# Altium PCB PROGRAM COUNTER.PcbDoc
Units mil, origin at the board's own origin, x right, y up, seen from the top; angles counter-clockwise.
Board outline 1540 x 1515 mil, 2 copper layers (Top Layer, Bottom Layer); 14 components, 19 nets, 67 pads, 7 vias.
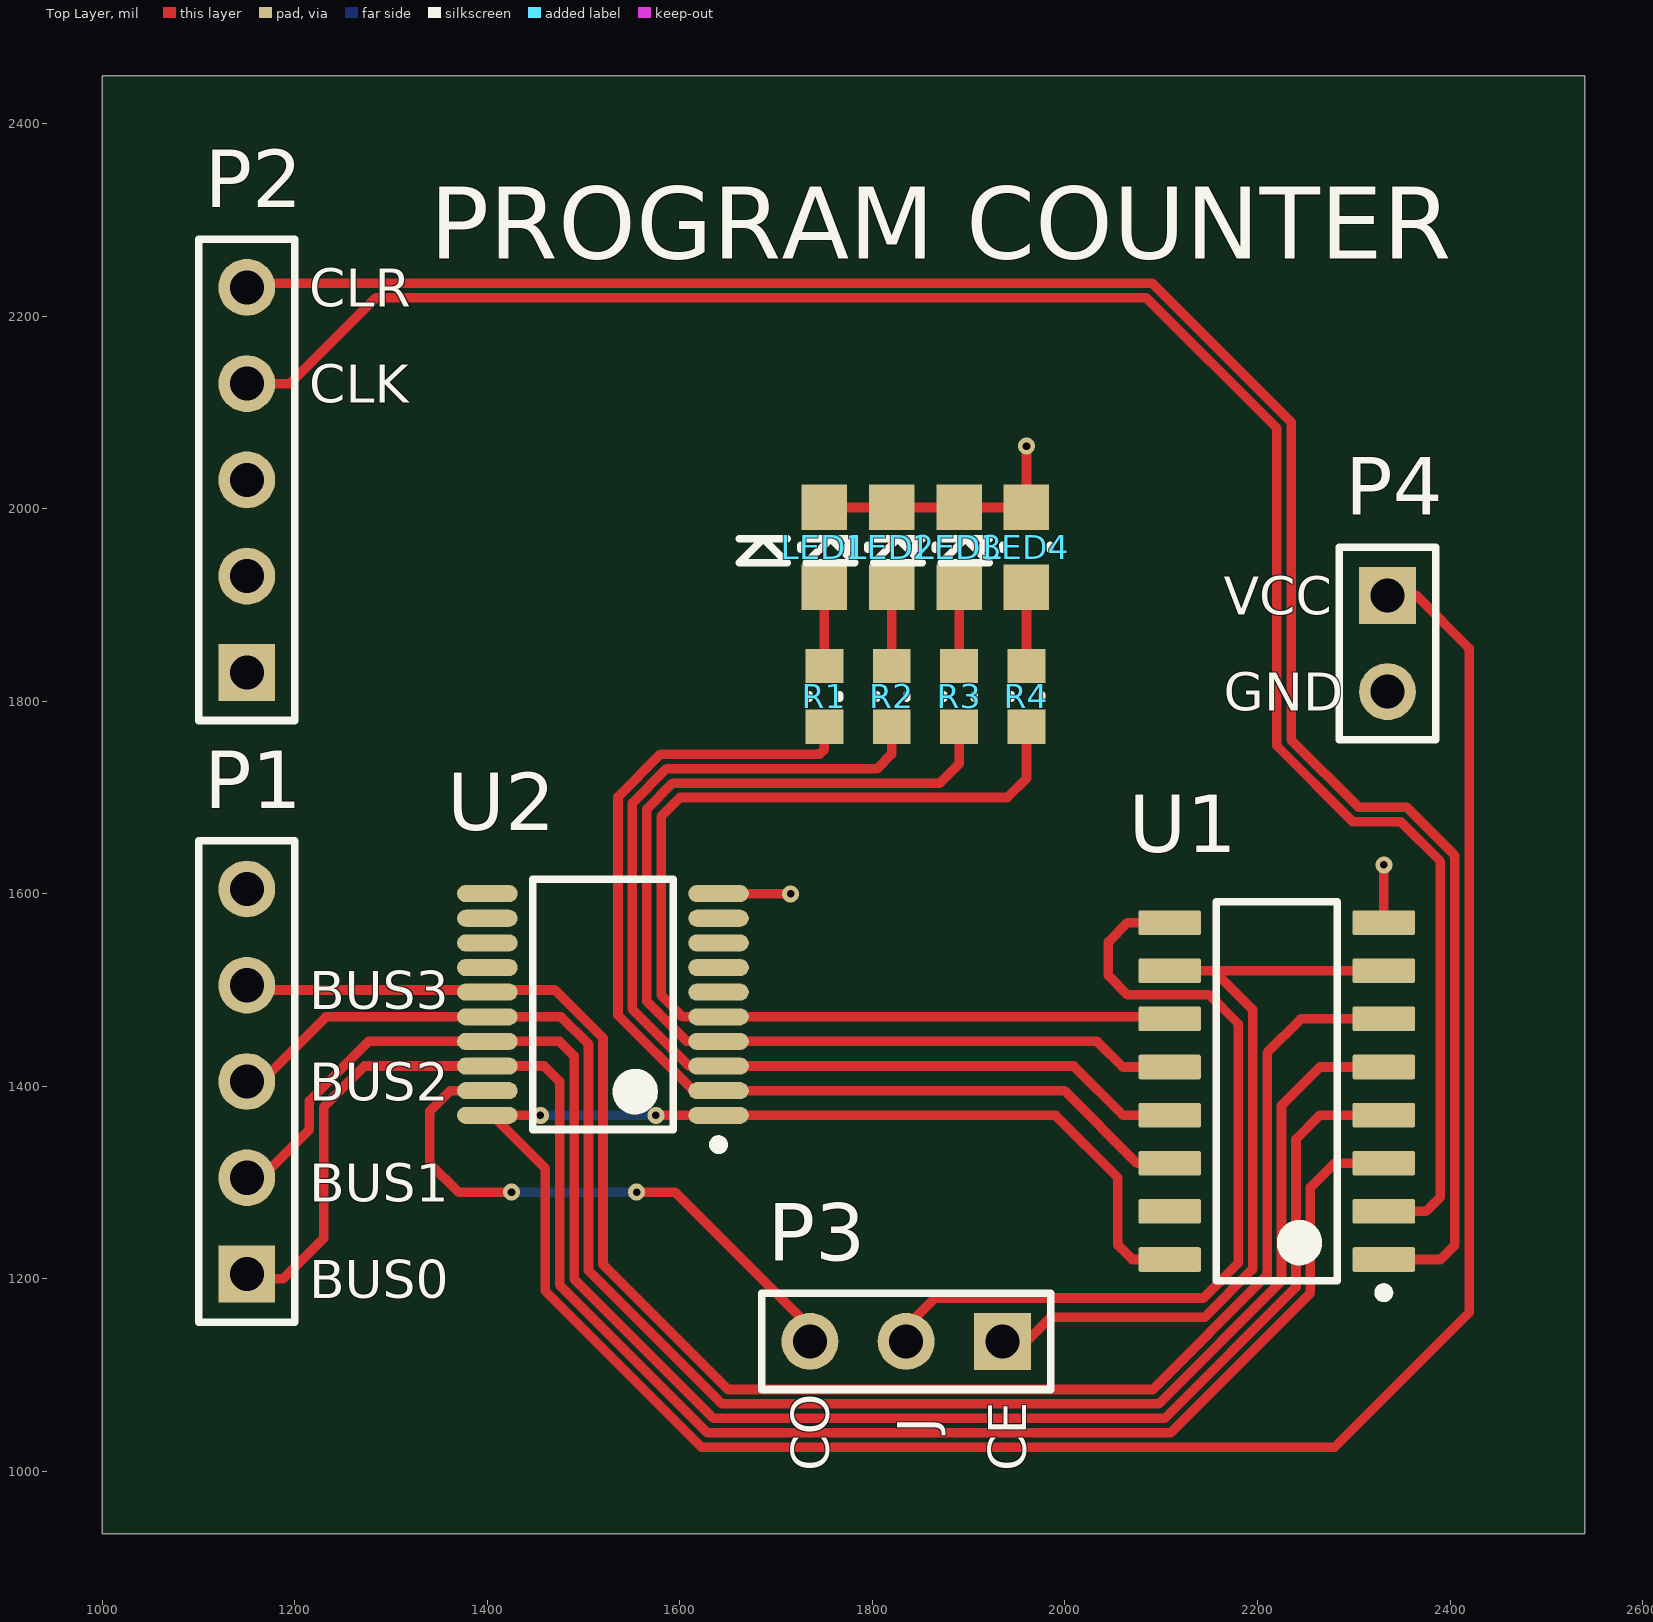
[diagram p0: Top Layer view]
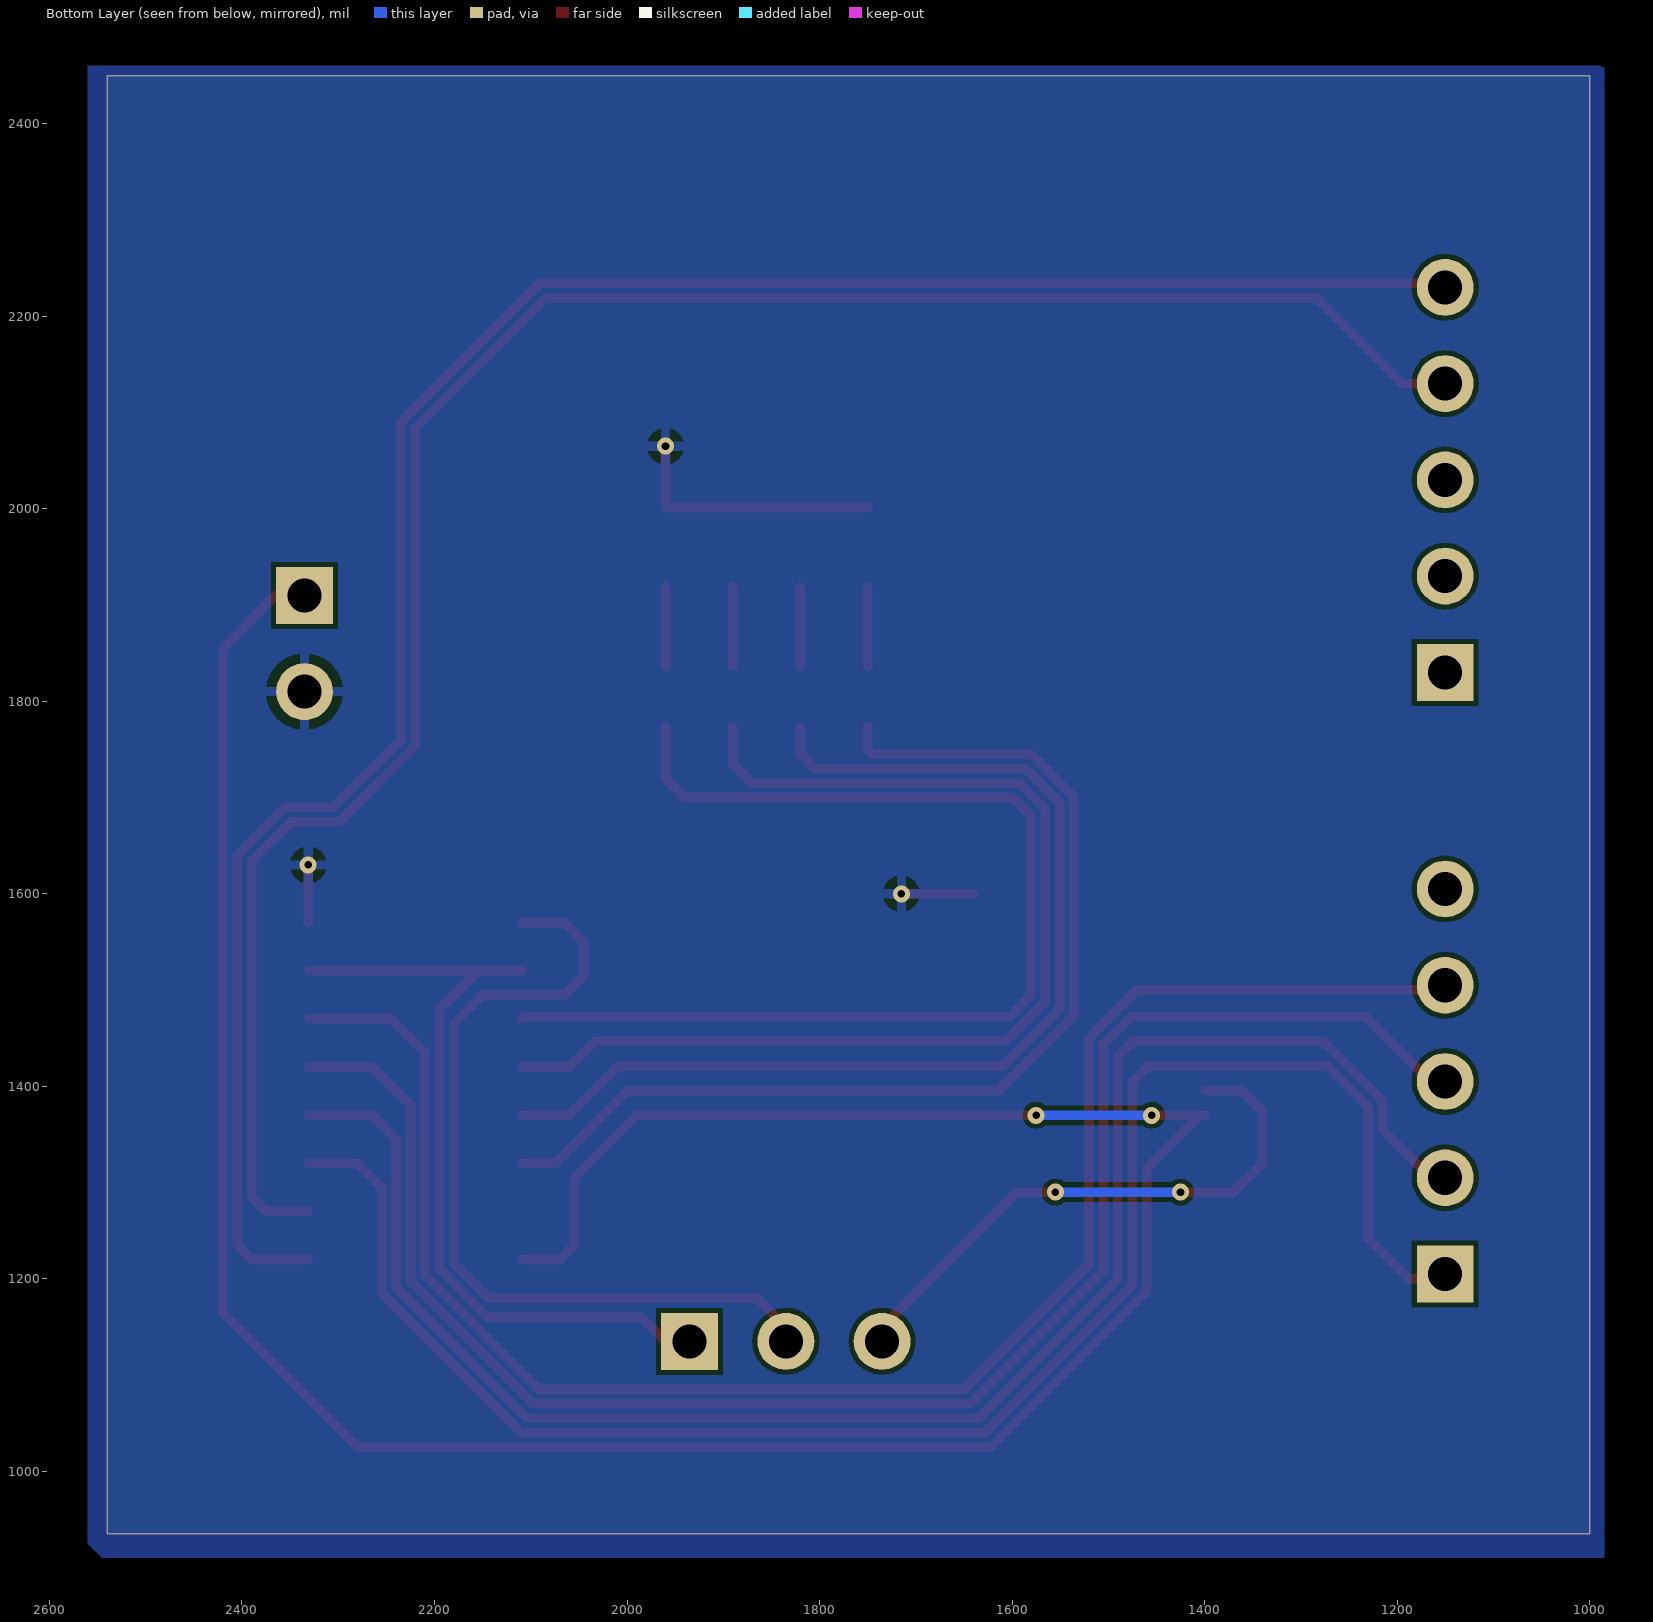
[diagram p1: Bottom Layer view, seen from below]

## Layer stack, top to bottom
Top Solder: solder mask 0.4, Solder Resist, Dk 3.5
Top Layer: signal copper 1.4
Dielectric 1: dielectric 12.6, FR-4, Dk 4.8
Bottom Layer: signal copper 1.4
Bottom Solder: solder mask 0.4, Solder Resist, Dk 3.5

## Board outline
1000,935 2540,935 2540,2450 1000,2450

## Design rules (kind name [scope] priority, off if disabled: settings)
Clearance [All] p1: gap=5 ignorepadtopadclearanceinfootprint=TRUE except(0: Arc-Hole Track-Hole SMDPad-Hole THPad-Hole Via-Hole Fill-Hole Poly-Hole Region-Hole Text-Hole)
PolygonConnect [All] p1: connectstyle=Relief reliefconductorwidth=10 reliefentries=4 polygonreliefangle="90 Angle" airgapwidth=10
RoutingVias [All] p1: holewidth=7.87 width=118.11 viastyle="Through Hole" minholewidth=7.87 minwidth=17.72 maxholewidth=78.74 maxwidth=17.72
SolderMaskExpansion [All] p1: expansion=4
Width [All] p1: maxlimit=39.37 minlimit=5 preferedwidth=10 minimp=50.000000 maximp=50.000000 favimp=50.000000
30 further rules are at their usual default settings.

## Components (designator, comment, footprint, x,y, rotation, side; value= is the part's Value field where it differs from the comment)
LED1 "LTST-C170CKT" LTST-C170CKT_V 1750,1960 r90 top
LED2 "LTST-C170CKT" LTST-C170CKT_V 1820,1960 r90 top
LED3 "LTST-C170CKT" LTST-C170CKT_V 1890,1960 r90 top
LED4 "LTST-C170CKT" LTST-C170CKT_V 1960,1960 r90 top
P1 "Header 5" HDR1X5 1150,1205 r90 top
P2 "Header 5" HDR1X5 1150,1830 r90 top
P3 "Header 3" HDR1X3 1935,1135 r180 top
P4 "Header 2" HDR1X2 2335,1910 r270 top
R1 "220R 1% 0603(1608)" RESC0603(1608)_N 1750,1805 r270 top value="220.00 Ohm"
R2 "220R 1% 0603(1608)" RESC0603(1608)_N 1820,1805 r270 top value="220.00 Ohm"
R3 "220R 1% 0603(1608)" RESC0603(1608)_N 1890,1805 r270 top value="220.00 Ohm"
R4 "220R 1% 0603(1608)" RESC0603(1608)_N 1960,1805 r270 top value="220.00 Ohm"
U1 "SN74HC161DR" D0016A_M 2220,1395 r180 top
U2 "SN74HC245PWT" PW0020A_M 1520,1485 r180 top

## Footprints (in the part's own frame and the unit in brackets; to place one, negate y for a bottom-side part, rotate by r counter-clockwise, add the part's x,y. Pads: shape width x height; smd on the part's side, far side on the other; paste and mask are expansions set on the pad)
D0016A_M [mm] "SOIC, 16-Leads, Body 10x4mm, Pitch 1.27mm, IPC Low Density"
  rrect15% 1.65x0.65 smd: 1(-2.825,4.445) 2(-2.825,3.175) 3(-2.825,1.905) 4(-2.825,0.635) 5(-2.825,-0.635) 6(-2.825,-1.905) 7(-2.825,-3.175) 8(-2.825,-4.445) 9(2.825,-4.445) 10(2.825,-3.175) 11(2.825,-1.905) 12(2.825,-0.635) 13(2.825,0.635) 14(2.825,1.905) 15(2.825,3.175) 16(2.825,4.445)
  silkscreen extent -2.95,-5 1.6,5.44, body extent -3,-4.95 3,4.95, height 1.59
HDR1X2 [mm] "Connector; Header; 2 Position"
  rect 1.5x1.5 hole 0.9: 1(0,0)
  round 1.5 hole 0.9: 2(2.54,0)
  silkscreen extent -1.27,-1.27 3.81,1.27
HDR1X3 [mm] "Connector; Header; 3 Position"
  rect 1.5x1.5 hole 0.9: 1(0,0)
  round 1.5 hole 0.9: 2(2.54,0) 3(5.08,0)
  silkscreen extent -1.27,-1.27 6.35,1.27
HDR1X5 [mm] "Connector; Header; 5 Position"
  rect 1.5x1.5 hole 0.9: 1(0,0)
  round 1.5 hole 0.9: 2(2.54,0) 3(5.08,0) 4(7.62,0) 5(10.16,0)
  silkscreen extent -1.27,-1.27 11.43,1.27
LTST-C170CKT_V [mm] "SMD, 2-Leads, Body 2x1.25mm"
  rect 1.2x1.2 smd: 1(-1.05,0) 2(1.05,0)
  silkscreen extent -0.41,-0.63 0.23,2.25, body extent -1,-0.63 1,0.63, height 1.1
PW0020A_M [mm] "SOP, 20-Leads, Body 6.6x4.5mm, Pitch 0.65mm, IPC Low Density"
  oval 1.6x0.45 smd: 1(-3.05,2.925) 2(-3.05,2.275) 3(-3.05,1.625) 4(-3.05,0.975) 5(-3.05,0.325) 6(-3.05,-0.325) 7(-3.05,-0.975) 8(-3.05,-1.625) 9(-3.05,-2.275) 10(-3.05,-2.925) 11(3.05,-2.925) 12(3.05,-2.275) 13(3.05,-1.625) 14(3.05,-0.975) 15(3.05,-0.325) 16(3.05,0.325) 17(3.05,0.975) 18(3.05,1.625) 19(3.05,2.275) 20(3.05,2.925)
  silkscreen extent -3.18,-3.3 1.85,3.82, body extent -3.21,-3.25 3.21,3.25, height 1
RESC0603(1608)_N [mm] "Chip Resistor, Body 1.6x0.8mm, IPC Medium Density"
  rect 0.9x1 smd: 1(-0.8,0) 2(0.8,0)
  silkscreen extent -0.05,-0.4 0.05,0.4, body extent -0.85,-0.47 0.85,0.47, height 0.6

## Part data
LED1 LED2 LED3 LED4: library part CMP-1674-00001-5, "LED Uni-Color Red, 100 mW, 200 mA, -55 to 85 degC, 2-Pin SMD, RoHS, Tape and Reel", Colour=Red, Manufacturer=Lite-On, Max Operating Temperature="85 degC", Min Operating Temperature="-55 degC", Package Quantity=3000, ComponentLink1Description="Manufacturer URL", ComponentLink1URL=http://www.us.liteon.com/, ComponentLink2Description=Datasheet, ComponentLink2URL=http://media.digikey.com/pdf/Data%20Sheets/Lite-On%20PDFs/LTST-C170CKT.pdf, DatasheetVersion=03/2003, HEIGHT="1.1 mm", Length="2 mm", Mount="Surface Mount", Mounting Technology="Surface Mount", PackageDescription="2-Pin Surface Mount Device, Body 2 x 1.25 mm", PackageReference=C170CKT, Packaging="Tape and Reel", Pins=2, RoHSCompliant=true
P1 P2: "Header, 5-Pin", LatestRevisionDate=17-Jul-2002, LatestRevisionNote="Re-released for DXP Platform.", Publisher="Altium Limited"
P3: "Header, 3-Pin", LatestRevisionDate=17-Jul-2002, LatestRevisionNote="Re-released for DXP Platform.", Publisher="Altium Limited"
P4: "Header, 2-Pin", LatestRevisionDate=17-Jul-2002, LatestRevisionNote="Re-released for DXP Platform.", Publisher="Altium Limited"
R1 R2 R3 R4: library part CMP-1012-00433-1, "220R 0.1W 1% 0603 (1608 Metric)  SMD", Case-EIA=0603, Case-Metric=1608, Power="0.1 W", Tolerance="1 %", Technology=SMT
U1: library part CMP-1623-00181-2, "4-Bit Synchronous Binary Counters, D0016A, LARGE T&R", F @ Nom Voltage(Max)(Mhz)=28, Generic Part Number=SN74HC161, ICC @ Nom Voltage(Max)(mA)=0.08, Manufacturer="Texas Instruments", Operating Temperature Range(C)="-40 to 85", Rating=Catalog, tpd @ Nom Voltage(Max)(ns)=46, Voltage(Nom)(V)=3.3,5, Bits(#)=4, Code_JEDEC="MS-012 variation AC", DatasheetVersion=SCLS297D, Function=Counter, Inputs=1, Input Type=LVTTL/CMOS, Output Drive (IOL/IOH)(Max)(mA)=5.2/-5.2, Output Type=CMOS, PackageReference=D0016A, Schmitt Trigger=No, Technology Family=HC, Type=Binary, VCC(Max)(V)=6, VCC(Min)(V)=2
U2: library part CMP-1620-00532-1, "Octal Bus Transceivers With 3-State Outputs, PW0020A, SMALL T&R", F @ Nom Voltage(Max)(Mhz)=28, Generic Part Number=SN74HC245, ICC @ Nom Voltage(Max)(mA)=0.08, Manufacturer="Texas Instruments", Operating Temperature Range(C)="-40 to 85", Rating=Catalog, tpd @ Nom Voltage(Max)(ns)=22, Voltage(Nom)(V)=6, Bits(#)=8, Code_JEDEC=MO-153, ComponentLink1Description="Manufacturer URL", ComponentLink1URL=http://www.ti.com/, ComponentLink2Description=Datasheet, ComponentLink2URL=http://www.ti.com/lit/ds/symlink/sn74hc245.pdf, ComponentLink3Description="Package Specification", ComponentLink3URL=http://www.ti.com/lit/ml/mpds362/mpds362.pdf, DatasheetVersion=SCLS131D, Input Type=CMOS, Output Drive (IOL/IOH)(Max)(mA)=-6/6, Output Type=CMOS, PackageReference=PW0020A, PartNumber=SN74HC245PWT, Schmitt Trigger=No, Technology Family=HC, VCC(Max)(V)=6, VCC(Min)(V)=2

## Via types
v1: diameter 17.72, hole 7.87, Top Layer to Bottom Layer, 7 vias

## Nets (pads, with @x,y where several pads share a name; then routed paths per layer and width w, separated by ;. In a path a pad name is that pad's centre, name@x,y a point inside that pad or via, vN(x,y) a via of type N, cw(c..) or ccw(c..) an arc to the next point about the centre after c; other vN are vias at no path point)
GND: LED1.2 LED2.2 LED3.2 LED4.2 P4.2 U1.8 U2.10 | length 403.6
  Top Layer w10: U2.10 v1@1710,1600.16 ; LED1.2 LED2.2 LED3.2 LED4.2 v1(1960,2065) ; U1.8 v1(2331.22,1630)
  other v1: 1715,1600
NetLED1_1: LED1.1 R1.1 | length 82.2
  Top Layer w10: R1.1 LED1.1
NetLED2_1: LED2.1 R2.1 | length 82.2
  Top Layer w10: R2.1 LED2.1
NetLED3_1: LED3.1 R3.1 | length 82.2
  Top Layer w10: R3.1 LED3.1
NetLED4_1: LED4.1 R4.1 | length 82.2
  Top Layer w10: R4.1 LED4.1
NetP1_1: P1.1 U1.3 U2.18 | length 1804.7
  Top Layer w10: P1.1@1160,1200 1187.8,1200 1230,1242.2 1230,1378.79 1272.24,1421.02 U2.18 1458.98,1421.02 1475,1405 1475,1193.79 1628.79,1040 2109.85,1040 2255,1185.15 2255,1295 2280,1320 U1.3
NetP1_2: P1.2 U1.4 U2.17 | length 1767.9
  Top Layer w10: P1.2@1160,1300 1215,1355 1215,1385 1276.61,1446.61 U2.17 1474.97,1446.61 1490,1431.58 1490,1200 1635,1055 2103.64,1055 2240,1191.36 2240,1345 2265,1370 U1.4
NetP1_3: P1.3 U1.5 U2.16 | length 1757.2
  Top Layer w10: P1.3@1160,1400 1232.2,1472.2 U2.16 1476.58,1472.2 1505,1443.79 1505,1208.79 1643.79,1070 2097.43,1070 2225,1197.57 2225,1380 2265,1420 U1.5
NetP1_4: P1.4 U1.6 U2.15 | length 1775.7
  Top Layer w10: P1.4@1160,1500 1470,1500 1520,1450 1520,1215 1650,1085 2091.21,1085 2210,1203.79 2210,1435 2245,1470 U1.6
NetP2_4: P2.4 U1.2 | length 2126.7
  Top Layer w10: P2.4 1195,2130 1284.39,2219.39 2084.39,2219.39 2220,2083.79 2220,1753.79 2298.79,1675 2348.79,1675 2390,1633.79 2390,1285 2375,1270 U1.2
NetP2_5: P2.5 U1.1 | length 2181.3
  Top Layer w10: P2.5 1154.39,2234.39 2090.61,2234.39 2235,2090 2235,1760 2305,1690 2355,1690 2405,1640 2405,1235 2390,1220 U1.1
NetP3_1: P3.1 U1.7 U1.10 | length 840.1
  Top Layer w10: P3.1 1960,1135 1985,1160 2145,1160 2195,1210 2195,1480 2155,1520 ; U1.10 2155,1520 ; U1.7 2155,1520
NetP3_2: P3.2 U1.9 | length 919
  Top Layer w10: P3.2@1835,1115 P3.2 1835,1150 1865,1180 2143.79,1180 2180,1216.21 2180,1465 2150,1495 2065,1495 2045,1515 2045,1550 2065,1570 U1.9
NetP3_3: P3.3 U2.19 | length 603.1
  Top Layer w10: U2.19 1361.65,1395.43 1340,1373.79 1340,1320 1370,1290 v1(1425,1290) ; v1(1555,1290) 1595,1290 1735,1150 P3.3
  Bottom Layer w10: v1(1425,1290) v1(1555,1290)
NetR1_2: R1.2 U1.14 U2.2 | length 1122.1
  Top Layer w10: R1.2 1750,1750 1745,1745 1580,1745 1535.61,1700.61 1535.61,1473.79 1613.96,1395.43 U2.2 1999.57,1395.43 2075,1320 U1.14
NetR2_2: R2.2 U1.13 U2.3 | length 1137
  Top Layer w10: R2.2 1820,1745 1805,1730 1586.21,1730 1550.61,1694.39 1550.61,1480 1609.58,1421.02 U2.3 2008.98,1421.02 2060,1370 U1.13
NetR3_2: R3.2 U1.12 U2.4 | length 1153.7
  Top Layer w10: R3.2 1890,1735 1870,1715 1592.43,1715 1565.61,1688.18 1565.61,1488.18 1607.17,1446.61 U2.4 2033.39,1446.61 2060,1420 U1.12
NetR4_2: R4.2 U1.11 U2.5 | length 1173.7
  Top Layer w10: R4.2 1960,1720 1940,1700 1600,1700 1580.61,1680.61 1580.61,1494.39 1602.8,1472.2 U2.5 2106.57,1472.2 U1.11
VCC: P4.1 U1.16 U2.1 U2.20 | length 2895.2
  Top Layer w10: U2.20 U2.20@1405.16,1369.84 ; v1(1455,1369.84) U2.20@1405.16,1369.84 ; v1(1575,1369.84) U2.1 1990.16,1369.84 2055,1305 2055,1235 2070,1220 U1.16 ; P4.1 2365,1910 2420,1855 2420,1165 2280,1025 1622.57,1025 1460,1187.57 1460,1315 U2.20@1405.16,1369.84
  Bottom Layer w10: v1(1455,1369.84) v1@1570.16,1369.84
pads on no net: P1.5 P2.1 P2.2 P2.3 U1.15 U2.6 U2.7 U2.8 U2.9 U2.11 U2.12 U2.13 U2.14

## Polygon pours and split planes (outlines as drawn)
GND on Bottom Layer "GND" (solid, pour order 0): 985,2465 990,2460 2560,2460 2560,925 2545,910 985,910

## Silkscreen, mask and mechanical layers (free items; w line width, h text height)
Top Overlay:
  text "PROGRAM COUNTER" at 1340,2260 h75
  text "CLR" at 1215,2210 h39.37
  text "CLK" at 1215,2110 h39.37
  text "VCC" at 2165,1890 h39.37
  text "GND" at 2165,1790 h39.37
  text "BUS3" at 1215,1480 h39.37
  text "BUS2" at 1215,1385 h39.37
  text "BUS1" at 1215,1280 h39.37
  text "BUS0" at 1215,1180 h39.37
  text "J" at 1865.39,1040 h39.37 r90
  text "CO" at 1755,1000 h39.37 r90
  text "CE" at 1960,1000 h39.37 r90
Board Outline:
  lines w3.94: 1000,935 1000,2450 2535,2450 2540,2445 2540,935 2535,930 1005,930 1000,935